# Altium PCB 激光测距1602.PcbDoc
Units mm, origin at the board's own origin, x right, y up, seen from the top; angles counter-clockwise.
Board outline 100.2 x 99.82 mm, 2 copper layers (Top Layer, Bottom Layer); 23 components, 30 nets, 127 pads, 11 vias.
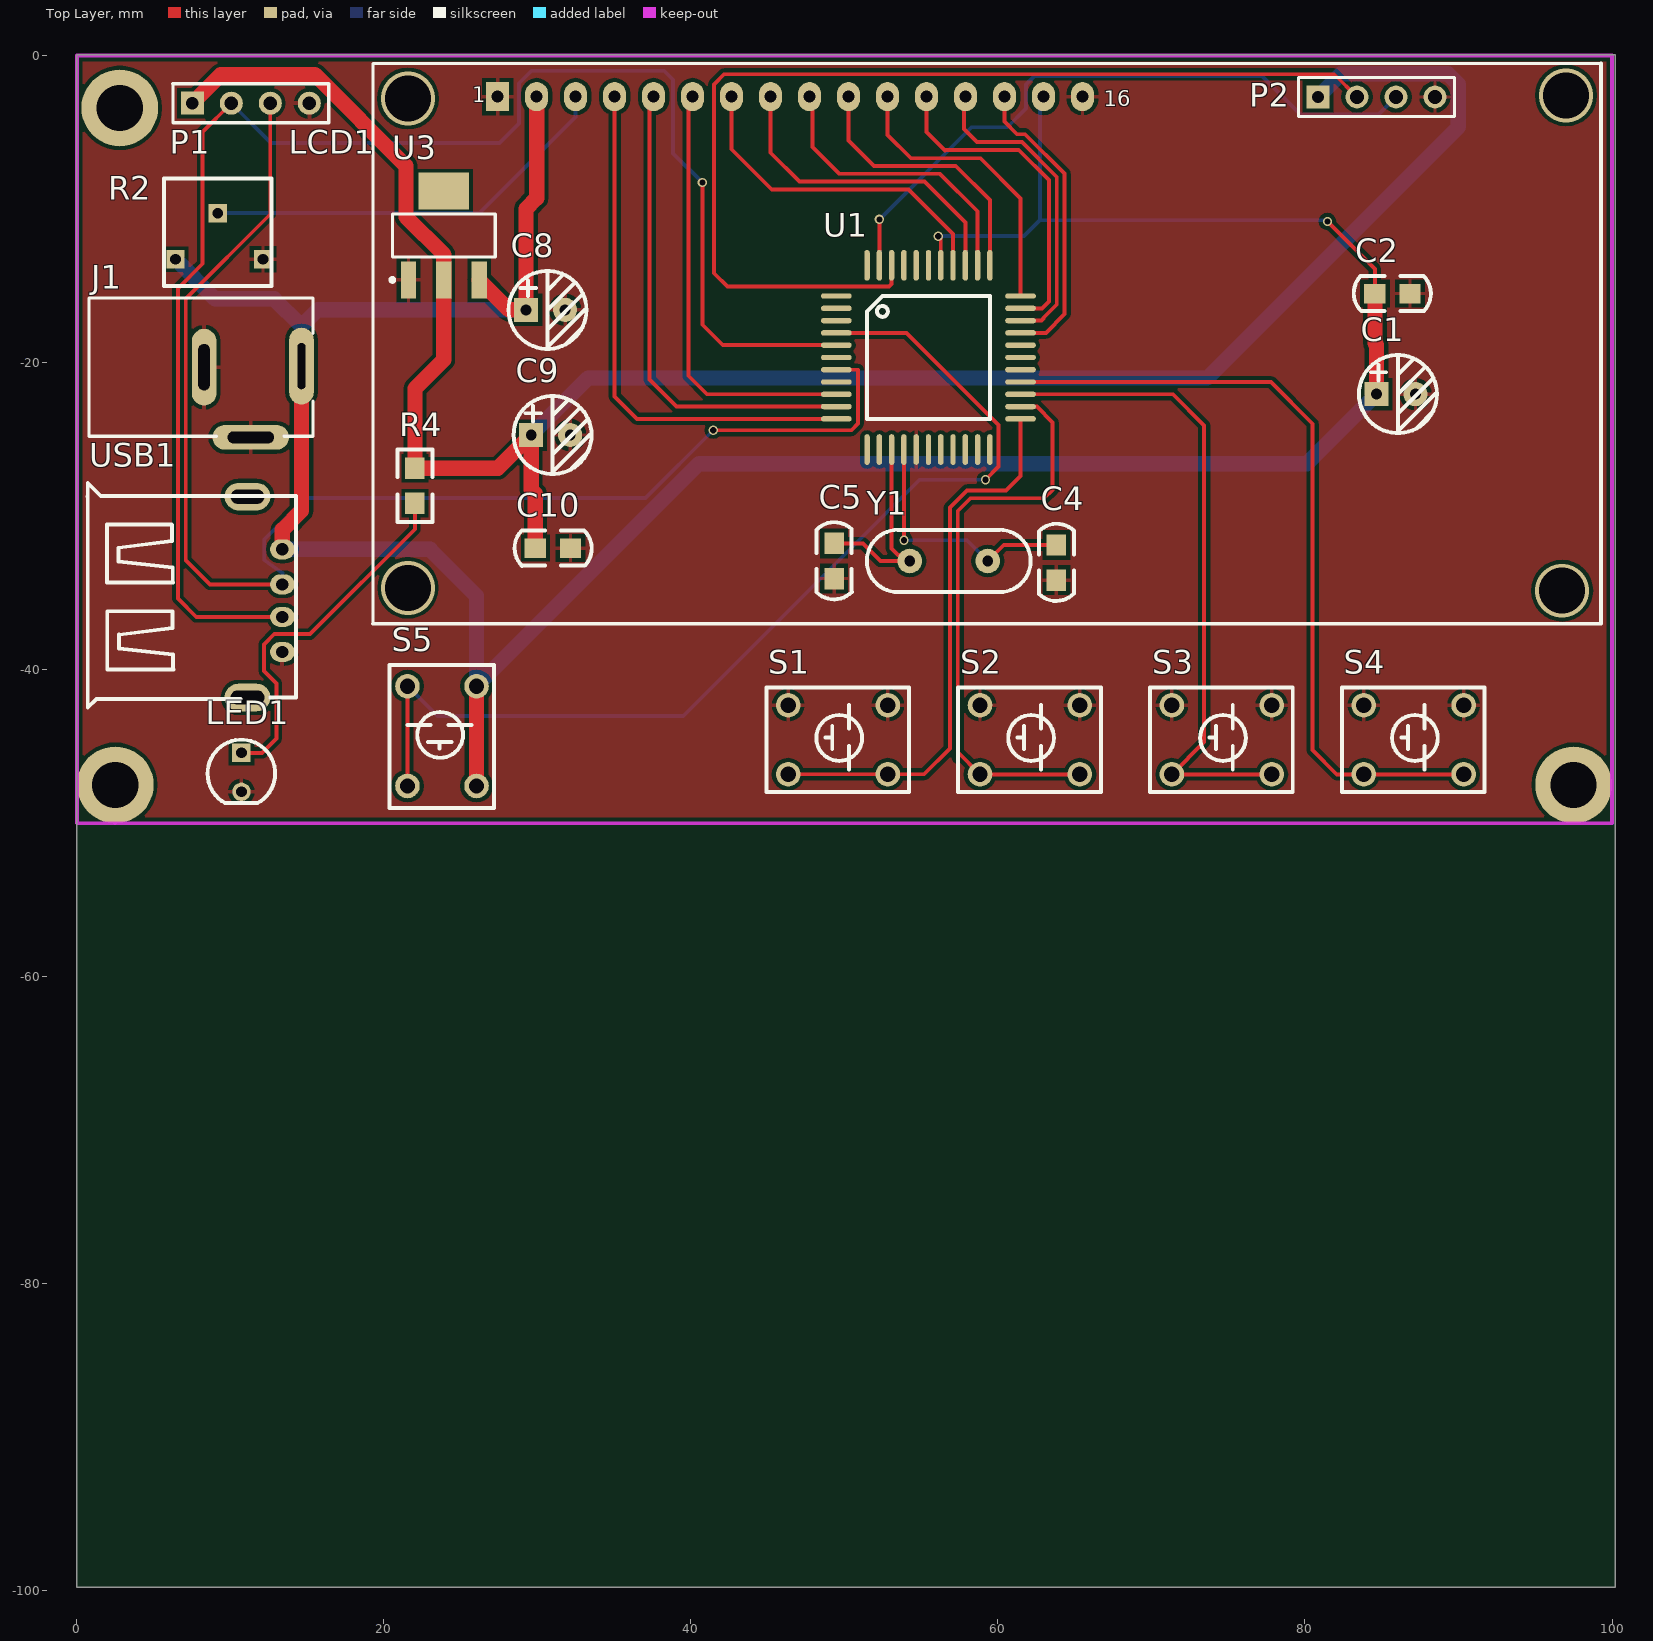
[diagram p0: Top Layer view]
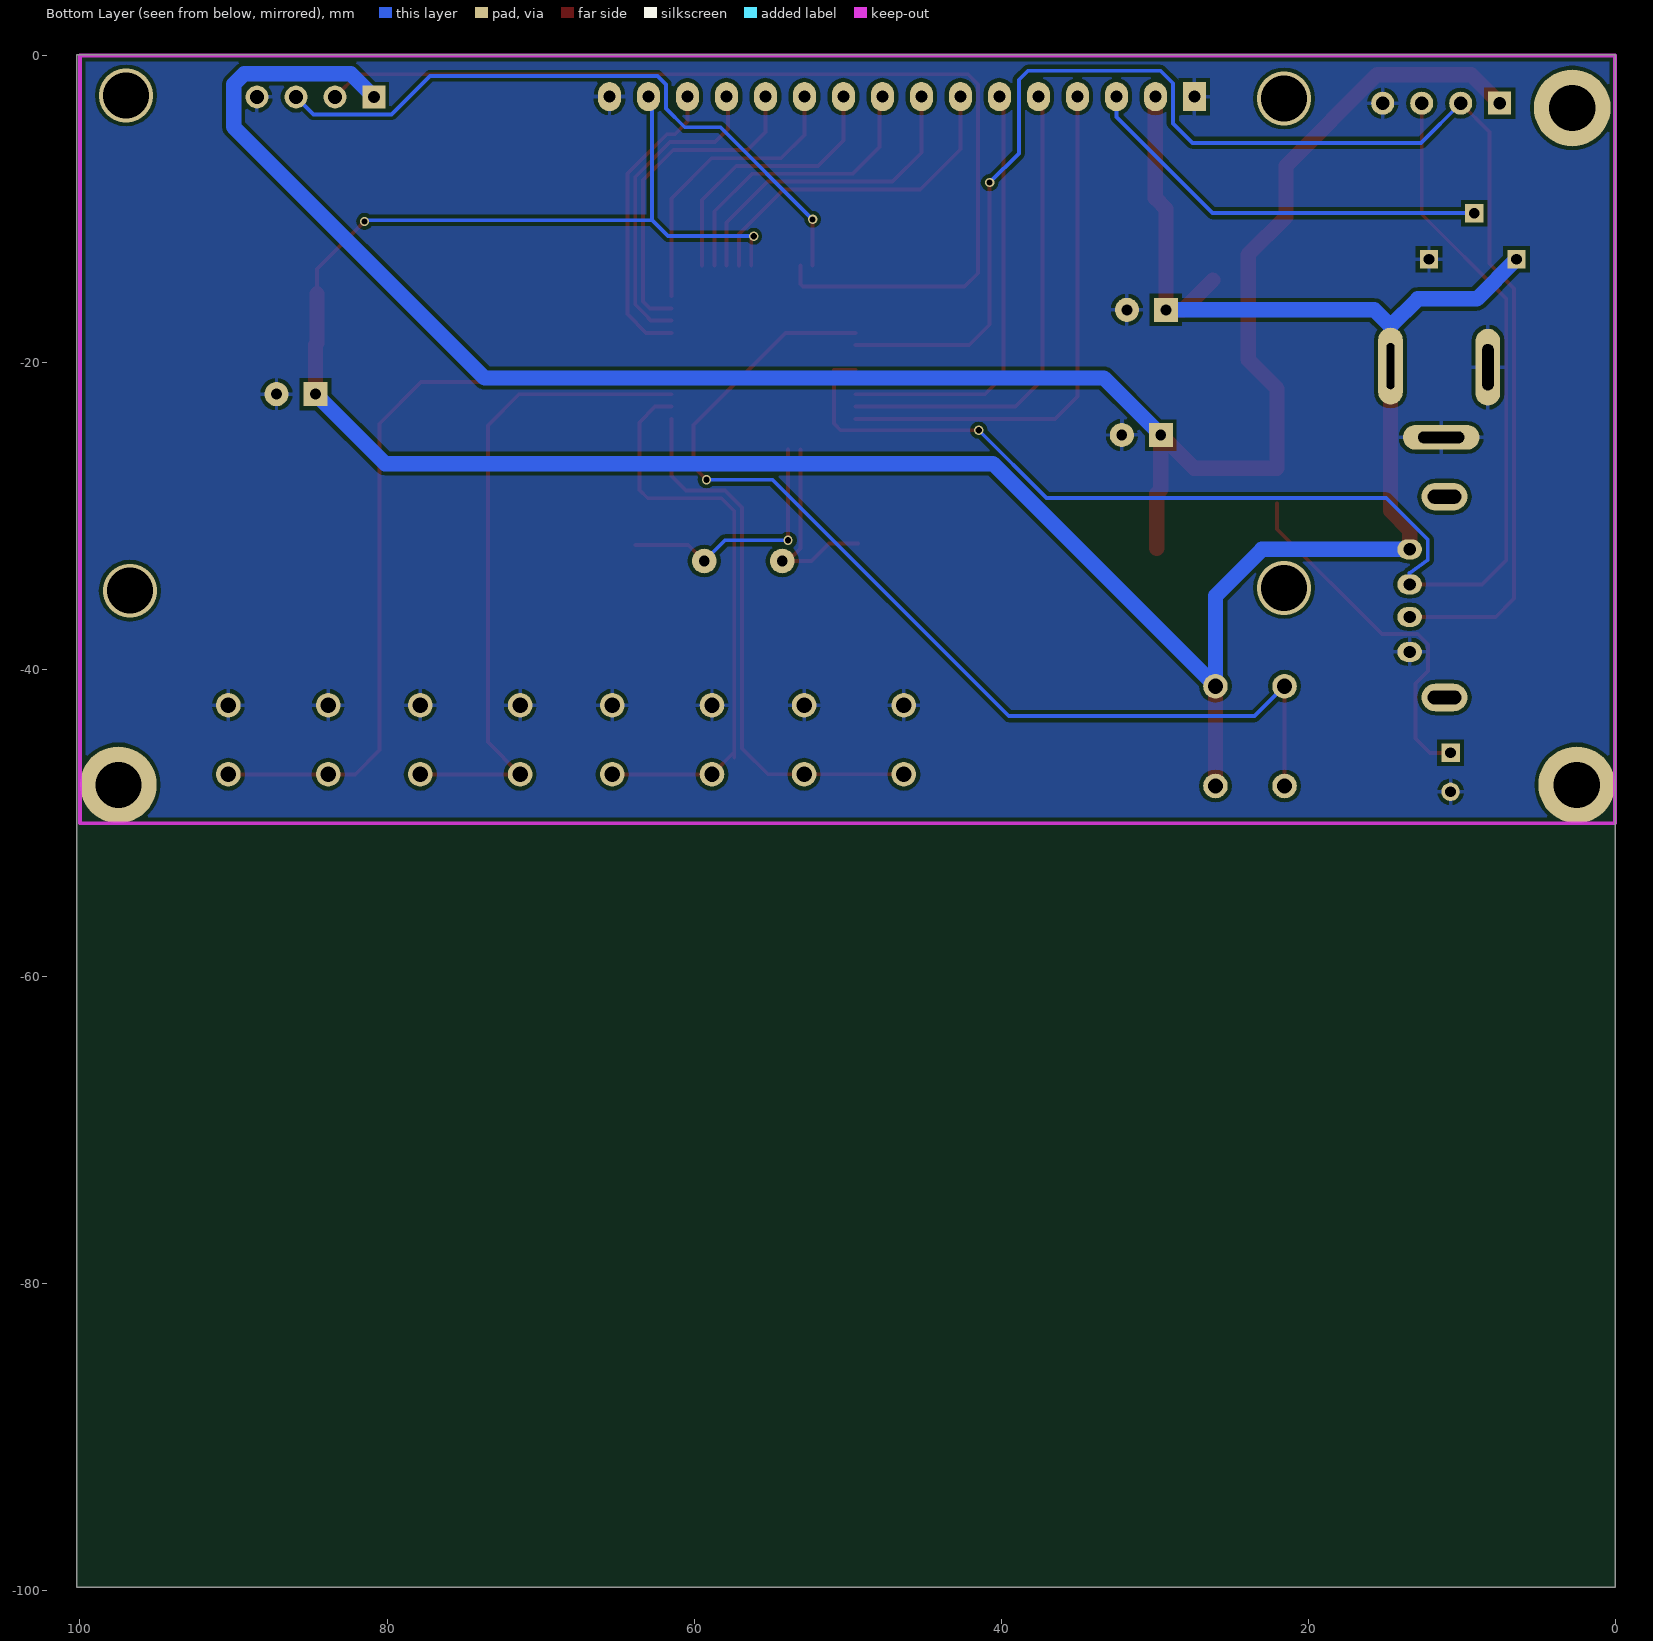
[diagram p1: Bottom Layer view, seen from below]
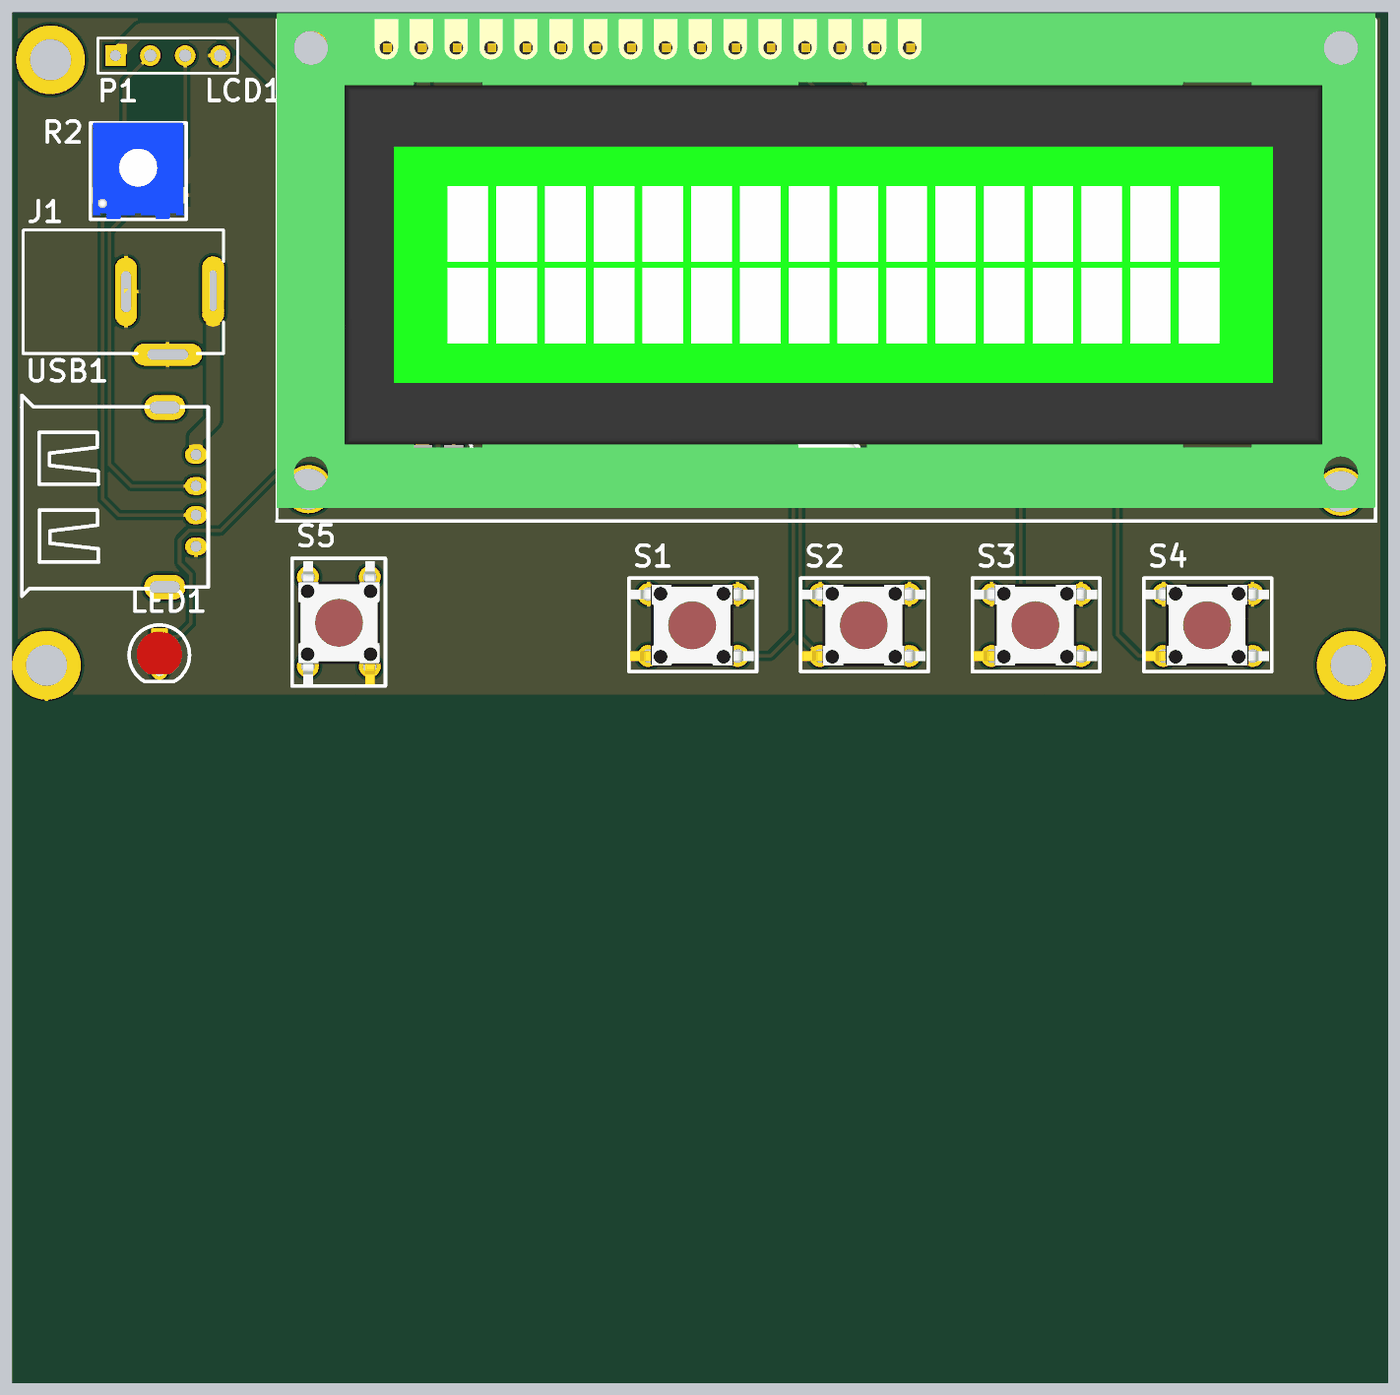
[diagram p2: 3D render of the assembled board from above, using the file's embedded part models]

## Layer stack, top to bottom
Top Layer: signal copper 0.0356
Dielectric: dielectric 0.32, FR-4, Dk 4.8
Bottom Layer: signal copper 0.0356

## Board outline
0,-99.771 0,0.051 100.203,0.051 100.203,-99.771 0,-99.771

## Design rules (kind name [scope] priority, off if disabled: settings)
Clearance [All] p1: gap=0.254
PolygonConnect [All] p1: connectstyle=Relief reliefconductorwidth=0.254 reliefentries=4 polygonreliefangle="90 Angle" airgapwidth=0.254
RoutingVias [All] p1: holewidth=0.4 width=0.6 viastyle="Through Hole" minholewidth=0.4 minwidth=0.6 maxholewidth=0.4 maxwidth=0.6
SolderMaskExpansion [All] p1: expansion=0.102
Width pwr [InNet('3V3')   Or InNet('VCC')] p1: maxlimit=2 minlimit=0.254 preferedwidth=1 minimp=50.000000 maximp=50.000000 favimp=50.000000
Width [All] p2: maxlimit=0.254 minlimit=0.254 preferedwidth=0.254
28 further rules are at their usual default settings.

## Components (designator, comment, footprint, x,y, rotation, side; value= is the part's Value field where it differs from the comment)
C1 "10u" rb.1/.2 84.658,-22.047 r0 top
C2 "104" 0805c 85.7,-15.494 r180 top
C4 "30p" 0805c 63.805,-33.02 r90 top
C5 "30p" 0805c 49.327,-32.918 r90 top
C8 "10u" rb.1/.2 29.261,-16.561 r0 top
C9 "10u" rb.1/.2 29.591,-24.714 r0 top
C10 "30p" 0805c 31.013,-32.08 r0 top
J1 "DC005" dc00521 7.772,-20.218 r0 top
LCD1 "LCD1602" LCD1602 58.268,-17.958 r0 top locked
LED1 "LED0" "led3 red" 10.719,-45.415 r270 top
P1 "Header 4" HDR1X4 10.312,-6.883 r90 top
P2 "Header 4" HDR1X4 83.642,-6.477 r90 top
R2 "10k" 3362 6.426,-13.259 r0 top
R4 "1k" 0805r 22.022,-28.016 r270 top
S1 "START/STOP" PB6*6-dip 46.332,-46.814 r90 top
S2 "SET TIME" PB6*6-dip 58.832,-46.814 r90 top
S3 "+" PB6*6-dip 71.332,-46.814 r90 top
S4 "-" PB6*6-dip 83.832,-46.814 r90 top
S5 "RST" PB6*6-dip 26.035,-47.574 r180 top
U1 "32s2_QFP44" LQFP44 55.474,-19.66 r0 top
U3 "AMS1117" SOT223 23.901,-11.709 r90 top
USB1 "USBF" USBAm 13.386,-34.442 r90 top
Y1 "12M" HC49S 56.794,-32.918 r0 top

## Footprints (in the part's own frame and the unit in brackets; to place one, negate y for a bottom-side part, rotate by r counter-clockwise, add the part's x,y. Pads: shape width x height; smd on the part's side, far side on the other; paste and mask are expansions set on the pad)
0805c [mil]
  rect 55x50 smd: 1(-45,0) 2(45,0)
  silkscreen extent -99,-45 99,45, body extent -49,-24 49,25, height 31
0805r [mil]
  rect 55x50 smd: 1(-45,0) 2(45,0)
  silkscreen extent -92,-45 93,45, body extent -39,-25 39,25, height 18
3362 [mm]
  rect 1.2x1.2 hole 0.7: 1(0,0) 2(2.75,3) 3(5.7,0)
  silkscreen extent -0.75,-1.75 6.25,5.25, body extent -0.55,-1.75 6.05,5.3, height 4.7
dc00521 [mm]
  oval 1.6x5 hole 0.5 slot 3 at 90 deg: 1(6.858,0)
  oval 5x1.6 hole 0.762 slot 3 at 0 deg: 2(3.556,-4.648)
  oval 1.6x5 hole 0.762 slot 3 at 90 deg: 3(0.515,-0.076)
  silkscreen extent -6.99,-4.58 7.61,4.42, body extent -7.98,-4.83 7.22,4.57, height 11
HC49S [mm]
  round 1.6 hole 0.7: 1(-2.54,0) 2(2.54,0)
  silkscreen extent -5.33,-2.03 5.33,2.03, body extent -5.59,-2.25 5.39,2.25, height 3.6
HDR1X4 [mm] "Connector; Header; 4 Position"
  rect 1.5x1.5 hole 0.8: 1(3.785,2.794)
  round 1.5 hole 0.9: 2(3.785,0.254) 3(3.785,-2.286) 4(3.785,-4.826)
  silkscreen extent 2.51,-6.1 5.05,4.06, body extent 2.49,-6.09 4.98,4.07, height 8.81
LCD1602 [mm]
  rect 1.5x1.9 hole 0.8: 1(-30.861,15.291)
  oval 1.5x1.9 hole 0.8: 2(-28.321,15.291) 3(-25.781,15.291) 4(-23.241,15.291) 5(-20.701,15.291) 6(-18.161,15.291) 7(-15.621,15.291) 8(-13.081,15.291) 9(-10.541,15.291) 10(-8.001,15.291) 11(-5.461,15.291) 12(-2.921,15.291) 13(-0.381,15.291) 14(2.159,15.291) 15(4.699,15.291) 16(7.239,15.291)
  silkscreen extent -38.99,-19.05 41.01,17.45, body extent -39.02,-18.08 40.98,17.92, height 20.01
"led3 red" [mm]
  rect 1.2x1.2 hole 0.7: 1(0,0)
  round 1.2 hole 0.7: 2(2.54,0)
  silkscreen extent -0.85,-2.2 3.28,2.2, body extent -0.39,-1.65 2.82,1.64, height 4.98
LQFP44 [mm]
  oval 2x0.35 smd: 1(-6,4) 2(-6,3.2) 3(-6,2.4) 4(-6,1.6) 5(-6,0.8) 6(-6,0) 7(-6,-0.8) 8(-6,-1.6) 9(-6,-2.4) 10(-6,-3.2) 11(-6,-4) 23(6,-4) 24(6,-3.2) 25(6,-2.4) 26(6,-1.6) 27(6,-0.8) 28(6,0) 29(6,0.8) 30(6,1.6) 31(6,2.4) 32(6,3.2) 33(6,4)
  oval 0.35x2 smd: 12(-4,-6) 13(-3.2,-6) 14(-2.4,-6) 15(-1.6,-6) 16(-0.8,-6) 17(0,-6) 18(0.8,-6) 19(1.6,-6) 20(2.4,-6) 21(3.2,-6) 22(4,-6) 34(4,6) 35(3.2,6) 36(2.4,6) 37(1.6,6) 38(0.8,6) 39(0,6) 40(-0.8,6) 41(-1.6,6) 42(-2.4,6) 43(-3.2,6) 44(-4,6)
  silkscreen extent -4,-4 4,4, body extent -5.99,-6.22 6.04,5.81, height 1.4
PB6*6-dip [mm]
  round 1.6 hole 1: 1(0,0) 1(0,-6.5) 2(4.5,0) 2(4.5,-6.5)
  silkscreen extent -1.14,-7.87 5.66,1.42, body extent -0.76,-7.67 5.24,1.32, height 5
rb.1/.2 [mil]
  rect 62x62 hole 27.56: 1(0,0)
  round 62 hole 27.56: 2(100,0)
  silkscreen extent -45,-100 155,100, body extent -44,-99 154,99, height 454
SOT223 [mm] "SOT223, 4-Leads, Body 6.5x3.5mm, Pitch 2.3mm, Lead Span 7mm, IPC Medium Density"
  rect 2.4x1 smd: 1(-2.9,2.3) 2(-2.9,0) 3(-2.9,-2.3)
  rect 2.4x3.3 smd: 4(2.9,0)
  silkscreen extent -3.02,-3.35 1.4,3.47, body extent -3.47,-3.25 3.53,3.25, height 1.69
USBAm [mm]
  oval 1.8x3 hole 0.9 slot 2.2 at 90 deg: 0(-7.366,2.27) 0(5.715,2.27)
  oval 1.3x1.6 hole 0.8: 1(2.28,0) 2(0,0) 3(-2.12,0) 4(-4.4,0)
  silkscreen extent -8.03,-0.89 6.6,12.7, body extent -8.92,-1.07 6.88,12.63, height 6.95

## Part data
C1 C8 C9: library part "Cap Pol1", "有极性电容器"
C2 C4 C5 C10: library part Cap, "瓷片电容"
J1: "电源插座"
LCD1: "16*2字符显示模块"
LED1: "发光二极管"
P1 P2: "直排针"
R2: library part "Res Tap", "电位器"
R4: library part Res2, "电阻"
S1 S2 S3 S4 S5: library part SW-PB
U3: "3.3V线性稳压芯片"
USB1: "USB插件"
Y1: library part XTAL, "无源晶振"

## Free pads (board coordinates)
  round 5 hole 3: 1(2.5,-47.5) 1(2.794,-3.404) 2(97.5,-47.5)

## Via types
v1: diameter 0.6, hole 0.4, Top Layer to Bottom Layer, 7 vias
v2: diameter 3.5, hole 3, Top Layer to Bottom Layer, 4 vias

## Nets (pads, with @x,y where several pads share a name; then routed paths per layer and width w, separated by ;. In a path a pad name is that pad's centre, name@x,y a point inside that pad or via, vN(x,y) a via of type N, cw(c..) or ccw(c..) an arc to the next point about the centre after c; other vN are vias at no path point)
3V3: C9.1 C10.1 P1.1 P2.1 R4.1 U3.2 | length 136.1
  Top Layer w1: P1.1 9.381,-1.236 15.497,-1.236 21.44,-7.18 21.44,-10.507 23.901,-12.969 U3.2 23.901,-19.804 22.022,-21.683 R4.1 27.432,-26.873 C9.1 29.591,-28.262 29.87,-28.541 C10.1
  Bottom Layer w1: C9.1 33.308,-20.998 73.637,-20.998 89.995,-4.64 89.995,-1.871 89.309,-1.186 82.355,-1.186 P2.1
DB0: LCD1.7 U1.37 | length 22.2
  Top Layer w0.254: LCD1.7 42.647,-6.096 45.263,-8.712 54.178,-8.712 57.074,-11.608 U1.37
DB1: LCD1.8 U1.36 | length 21
  Top Layer w0.254: LCD1.8 45.187,-6.325 47.066,-8.204 55.22,-8.204 57.874,-10.858 U1.36
DB2: LCD1.9 U1.35 | length 19.4
  Top Layer w0.254: LCD1.9 47.93,-2.87 47.93,-5.944 49.682,-7.696 56.236,-7.696 58.674,-10.134 U1.35
DB3: LCD1.10 U1.34 | length 17.9
  Top Layer w0.254: LCD1.10 50.267,-5.537 51.918,-7.188 57.252,-7.188 59.474,-9.41 U1.34
DB4: LCD1.11 U1.33 | length 19.2
  Top Layer w0.254: LCD1.11 52.807,-5.156 54.331,-6.68 58.852,-6.68 61.474,-9.302 U1.33
DB5: LCD1.12 U1.32 | length 21.6
  Top Layer w0.254: LCD1.12 55.347,-4.978 56.54,-6.172 56.578,-6.134 61.354,-6.134 63.322,-8.103 63.322,-16.002 62.865,-16.46 U1.32
DB6: LCD1.13 U1.31 | length 20.6
  Top Layer w0.254: LCD1.13 57.785,-2.768 57.785,-4.775 58.636,-5.626 61.564,-5.626 63.83,-7.892 63.83,-16.212 62.967,-17.076 62.967,-17.12 62.827,-17.26 U1.31
DB7: LCD1.14 U1.30 | length 19.5
  Top Layer w0.254: LCD1.14 60.427,-4.293 61.252,-5.118 61.775,-5.118 64.338,-7.682 64.338,-16.84 63.119,-18.06 U1.30
EN: LCD1.6 U1.9 | length 28.4
  Top Layer w0.254: LCD1.6 39.853,-2.921 39.853,-20.853 41.059,-22.06 U1.9
GND: C1.2 C2.1 C4.1 C5.1 C8.2 C9.2 C10.2 J1.2 J1.3 LCD1.1 LCD1.16 LED1.2 P1.4 P2.4 R2.3 S1.2 S2.2 S3.2 S4.2 U1.16 U3.1 USB1.4
IRQ: U1.8
K1: S1.1 U1.23 | length 36.1
  Top Layer w0.254: S1.1@46.332,-46.814 46.334,-46.812 55.194,-46.812 56.871,-45.136 56.871,-29.439 57.988,-28.321 60.528,-28.321 61.474,-27.376 U1.23
K2: S2.1 U1.24 | length 38.3
  Top Layer w0.254: 57.379,-45.72 57.379,-45.361 ; U1.24 62.534,-22.86 63.563,-23.889 63.563,-28.283 63.017,-28.829 58.199,-28.829 57.379,-29.649 57.379,-45.361 ; S2.1@65.332,-46.814 58.832,-46.814 57.379,-45.361
K3: S3.1 U1.25 | length 42.9
  Top Layer w0.254: U1.25 71.412,-22.06 73.431,-24.079 73.431,-44.715 71.332,-46.814 S3.1@77.832,-46.814
K4: S4.1 U1.26 | length 51.9
  Top Layer w0.254: U1.26 77.775,-21.26 80.493,-23.978 80.493,-45.237 82.069,-46.814 83.832,-46.814 S4.1@90.332,-46.814
LED: U1.29
LED2: U1.28
NetLCD1_3: LCD1.3 R2.2 | length 27.2
  Bottom Layer w0.254: R2.2 26.233,-10.259 32.487,-4.005 LCD1.3
NetLED1_1: LED1.1 R4.2 | length 23.8
  Top Layer w0.254: LED1.1 12.057,-45.415 12.997,-44.475 12.997,-40.886 12.195,-40.084 12.195,-38.346 12.855,-37.685 15.187,-37.685 22.022,-30.85 R4.2
P30: P1.2 U1.5 USB1.3 | length 100.6
  Top Layer w0.254: P1.2 8.181,-4.976 8.181,-13.555 6.581,-15.156 6.581,-35.369 7.775,-36.562 USB1.3 ; v1(40.744,-8.272) 40.744,-17.529 42.075,-18.86 U1.5
  Bottom Layer w0.254: P1.2 12.641,-5.681 27.536,-5.681 28.806,-4.411 28.806,-1.795 29.619,-0.982 38.255,-0.982 38.839,-1.567 38.839,-6.367 v1(40.744,-8.272)
P31: P1.3 U1.7 USB1.2 | length 89.2
  Top Layer w0.254: P1.3 12.598,-10.332 7.089,-15.841 7.089,-32.859 8.672,-34.442 USB1.2 ; v1(41.455,-24.401) 50.447,-24.401 50.879,-23.969 50.879,-20.46 U1.7
  Bottom Layer w0.254: USB1.2 13.386,-33.698 12.205,-32.859 12.205,-31.528 14.911,-28.821 37.036,-28.821 v1(41.455,-24.401)
RESET: S5.2 U1.4 | length 68.3
  Top Layer w0.254: S5.2@21.535,-47.574 S5.2@21.535,-41.074 ; U1.4 54.037,-18.06 60.048,-24.071 60.048,-26.763 v1(59.185,-27.627)
  Bottom Layer w0.254: S5.2@21.535,-41.074 23.48,-43.019 39.5,-43.019 54.892,-27.627 v1(59.185,-27.627)
RS: LCD1.4 U1.11 | length 34.6
  Top Layer w0.254: LCD1.4 35.027,-22.2 36.487,-23.66 U1.11
RW: LCD1.5 U1.10 | length 31.4
  Top Layer w0.254: LCD1.5 37.313,-2.921 37.313,-21.107 39.065,-22.86 U1.10
RXD2: P2.2 U1.42 | length 68.3
  Top Layer w0.254: U1.42 53.074,-14.866 52.899,-15.041 52.043,-15.041 52.039,-15.037 51.708,-15.037 51.704,-15.041 42.371,-15.041 41.506,-14.176 41.506,-1.871 42.167,-1.211 81.907,-1.211 P2.2
TXD2: P2.3 U1.43 | length 43
  Top Layer w0.254: U1.43 v1(52.274,-10.662)
  Bottom Layer w0.254: v1(52.274,-10.662) 58.27,-4.665 60.607,-4.665 61.826,-3.446 61.826,-1.871 62.385,-1.313 77.193,-1.313 79.708,-3.827 84.793,-3.827 P2.3
VCC: C1.1 C2.2 C8.1 J1.1 LCD1.2 LCD1.15 R2.1 S5.1 U1.38 U3.3 USB1.1 | length 199.5
  Top Layer w0.254: v1(56.109,-11.76) 56.274,-11.925 U1.38 ; v1(81.458,-10.795) 84.557,-13.894 C2.2
  Top Layer w1: USB1.1 13.386,-30.889 14.63,-29.645 J1.1 ; S5.1@26.035,-47.574 S5.1@26.035,-41.074 ; U3.3 28.153,-16.561 C8.1 29.261,-9.974 29.947,-9.288 LCD1.2 ; C2.2 84.557,-18.737 84.658,-18.839 C1.1
  Bottom Layer w0.254: v1(56.109,-11.76) 61.697,-11.76 62.738,-10.719 ; LCD1.15 62.738,-2.895 62.738,-10.719 ; v1(81.458,-10.795) 81.382,-10.719 62.738,-10.719
  Bottom Layer w1: R2.1 9.009,-15.841 12.855,-15.841 14.63,-17.617 14.63,-17.619 ; USB1.1 23.015,-32.162 26.035,-35.182 26.035,-41.074 40.536,-26.573 80.132,-26.573 C1.1 ; J1.1 14.63,-17.619 ; C8.1 15.689,-16.561 14.63,-17.619
X1: C4.2 U1.15 Y1.2 | length 16.8
  Top Layer w0.254: v1(53.874,-31.564) U1.15 ; Y1.2 60.376,-31.877 C4.2
  Bottom Layer w0.254: v1(53.874,-31.564) 57.98,-31.564 Y1.2
X2: C5.2 U1.14 Y1.1 | length 13.4
  Top Layer w0.254: C5.2 51.209,-31.775 52.352,-32.918 Y1.1 53.874,-32.538 53.495,-32.538 53.074,-32.117 U1.14
pads on no net: U1.1 U1.2 U1.3 U1.6 U1.12 U1.13 U1.17 U1.18 U1.19 U1.20 U1.21 U1.22 U1.27 U1.39 U1.40 U1.41 U1.44 U3.4 USB1.0
copper on no net: | length 2.5
  Top Layer w0.254: 2.5,-49.985 2.5,-47.5
  other v2: 96.749,-34.849 21.565,-34.671 21.565,-2.794 97.003,-2.591

## Polygon pours and split planes (outlines as drawn)
GND on Top Layer "Bottom Layer-No Net" (solid, remove dead copper, pour order 4): -0.203,0.076 -0.203,-51.537 100,-51.537 100,0 0,0
GND on Bottom Layer "Bottom Layer-No Net" (solid, remove dead copper, pour order 6): 0,0 99.847,0 99.847,-51.511 -0.203,-51.511 -0.203,0

## Keep-outs
Keep-Out Layer:
  lines w0.254: 0,-50 0,0 100,0 100,-50 0,-50

## Text inside footprints (layer, text, board x,y; h text height)
LCD1: Top Overlay "16" at 66.904,-3.302 h1; Top Overlay "1" at 25.756,-3.048 h1